# Altium PCB Quadruple_7_Seg_Disp_1.PcbDoc
Units mm, origin at the board's own origin, x right, y up, seen from the top; angles counter-clockwise.
Board outline 79.5 x 36.96 mm, 2 copper layers (Top Layer, Bottom Layer); 29 components, 37 nets, 137 pads, 83 vias.
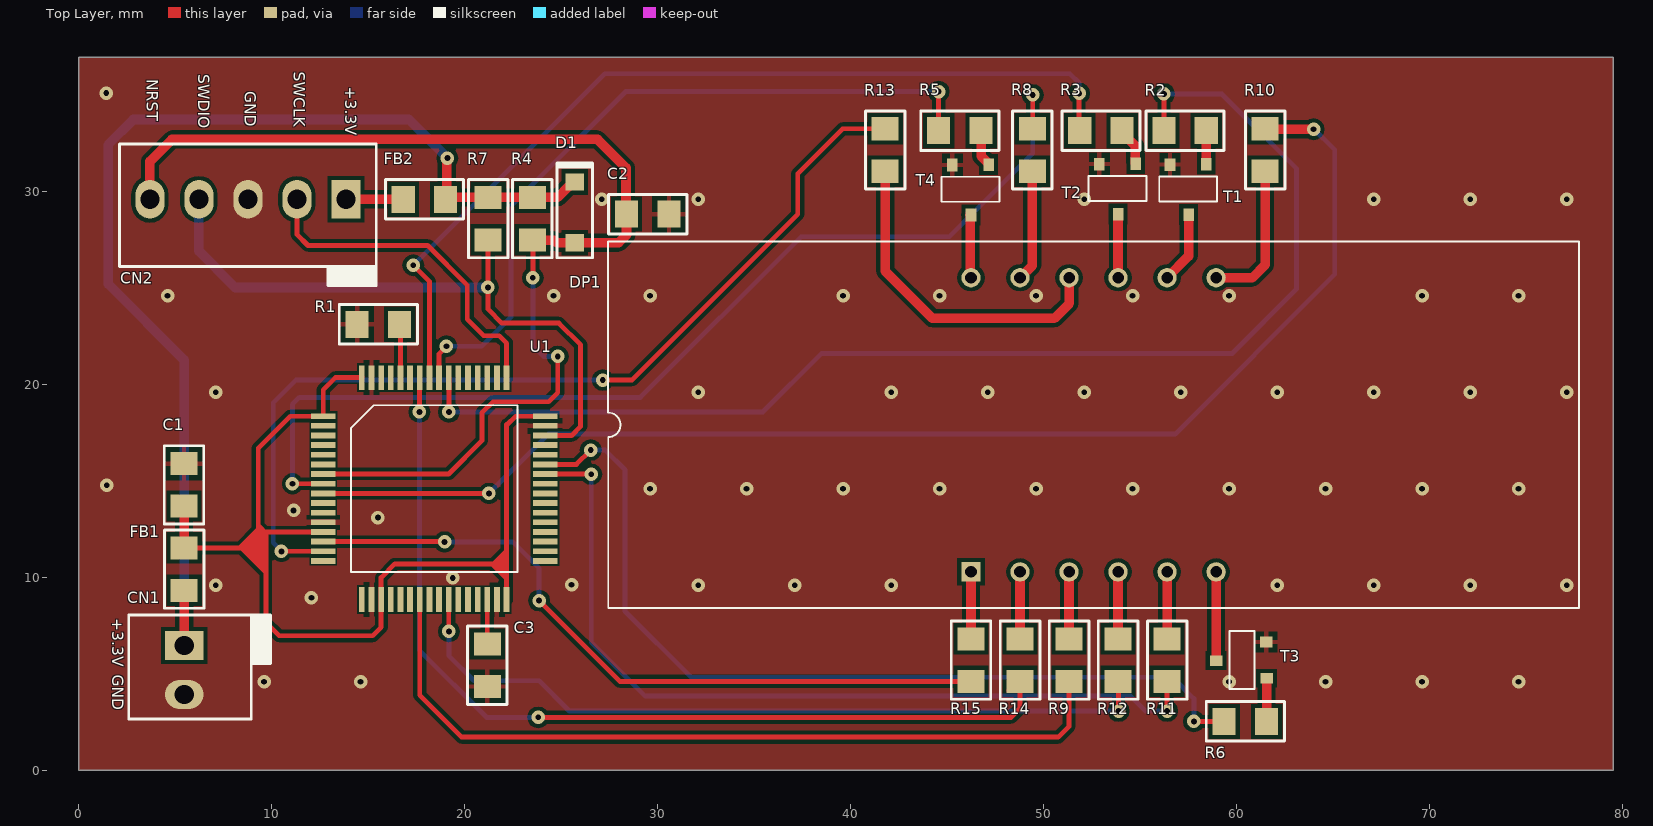
[diagram p0: Top Layer view]
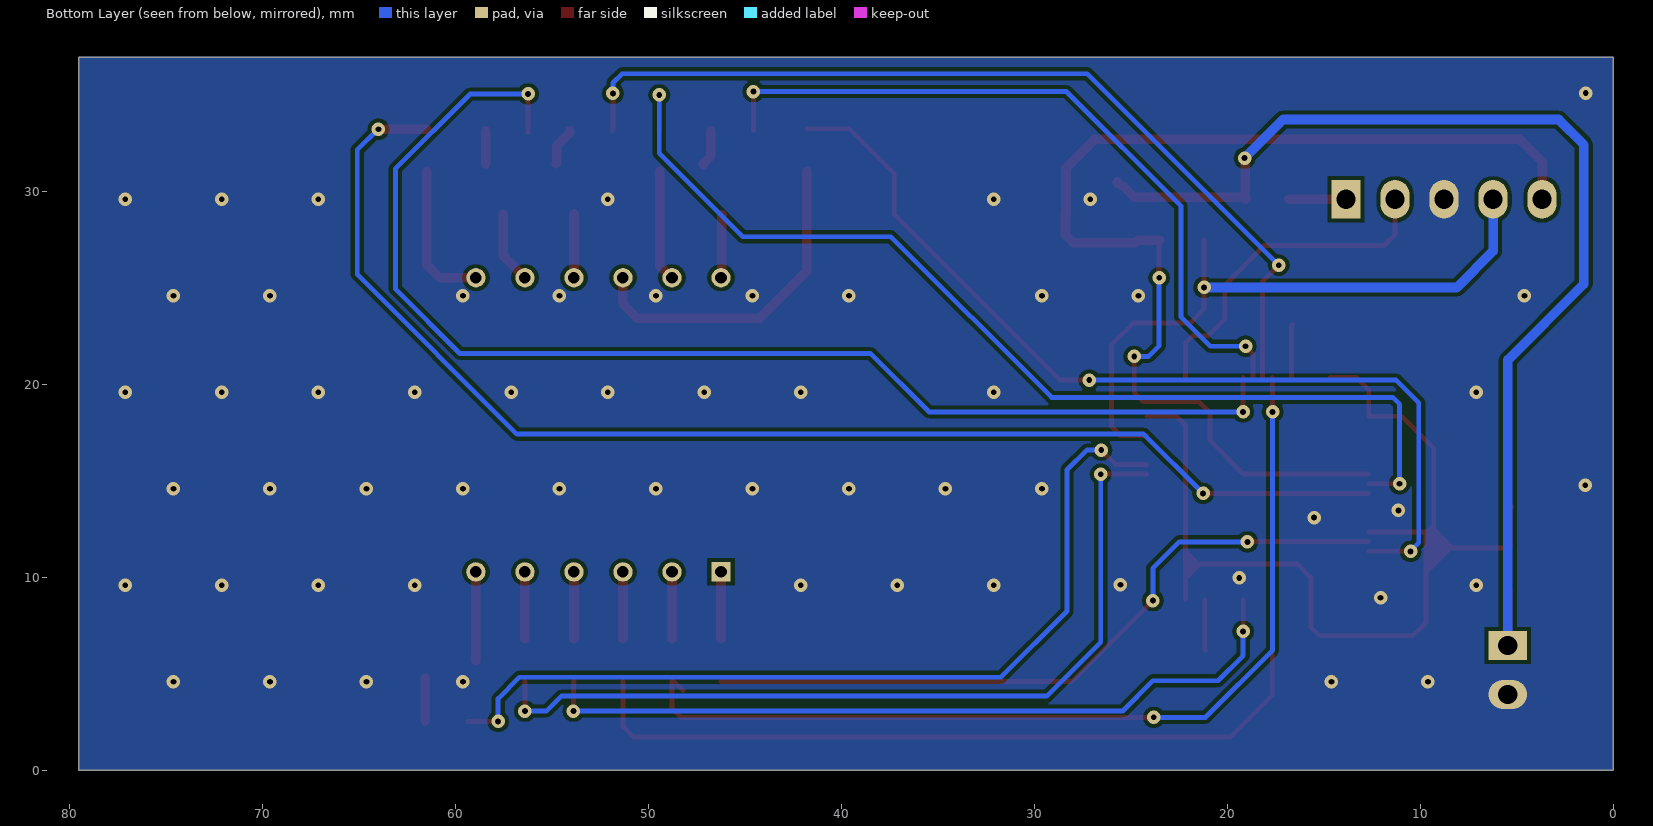
[diagram p1: Bottom Layer view, seen from below]
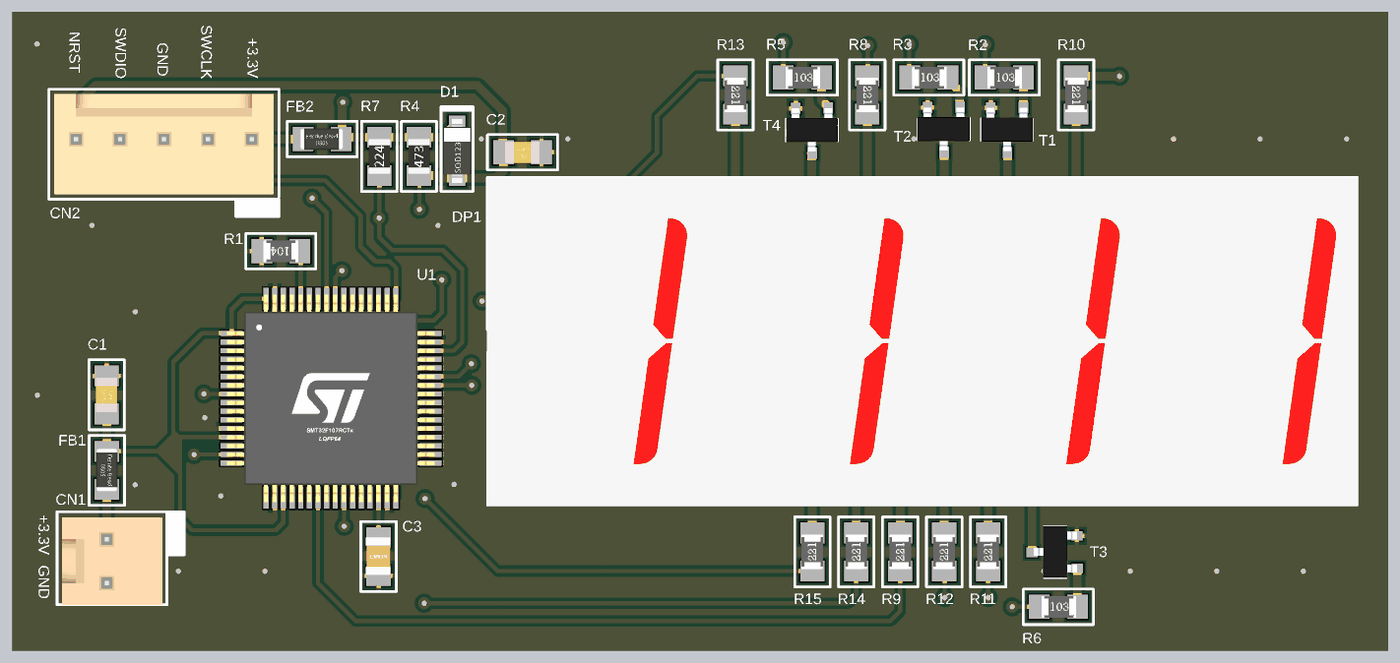
[diagram p2: 3D render of the assembled board from above, using the file's embedded part models]

## Layer stack, top to bottom
Top Solder: solder mask 0.0102, Solder Resist, Dk 3.5
Top Layer: signal copper 0.0356
Dielectric 1: dielectric 0.32, FR-4, Dk 4.8
Bottom Layer: signal copper 0.0356
Bottom Solder: solder mask 0.0102, Solder Resist, Dk 3.5

## Board outline
0,0 79.502,0 79.502,36.957 0,36.957

## Design rules (kind name [scope] priority, off if disabled: settings)
Clearance "Stitching No Net" [IsStitchingVia and InNet('No Net') vs (IsVia and (Not IsStitchingVia)) Or IsPad] p1: gap=0.127 ignorepadtopadclearanceinfootprint=FALSE
Clearance Clearance_U1 [InComponent('U1')] p2: gap=0.1 ignorepadtopadclearanceinfootprint=FALSE
Clearance [All] p3: gap=0.2 ignorepadtopadclearanceinfootprint=FALSE
PlaneConnect [InPadClass('via')] p1: planeconnectstyle=Direct reliefexpansion=0.508 reliefentries=4 reliefconductorwidth=0.254 reliefairgap=0.254
PolygonConnect PolygonConnect_GND [InNet('GND')] p1: thpad.connectstyle=Direct thpad.reliefconductorwidth=0.254 thpad.reliefentries=4 thpad.polygonreliefangle="90 Angle" thpad.airgapwidth=0.254 smdpad.connectstyle=Relief smdpad.reliefconductorwidth=0.254 smdpad.reliefentries=4 smdpad.polygonreliefangle="90 Angle" smdpad.airgapwidth=0.254 via.connectstyle=Direct via.reliefconductorwidth=0.254 via.reliefentries=4 via.polygonreliefangle="90 Angle" via.airgapwidth=0.254
PolygonConnect [All] p2: connectstyle=Relief reliefconductorwidth=0.254 reliefentries=4 polygonreliefangle="90 Angle" airgapwidth=0.254
RoutingVias RoutingVias_GND [All] p1: holewidth=0.711 width=1.27 viastyle="Through Hole" minholewidth=0.711 minwidth=1.27 maxholewidth=0.711 maxwidth=1.27
RoutingVias [All] p2: holewidth=0.3 width=0.7 viastyle="Through Hole" minholewidth=0.3 minwidth=0.7 maxholewidth=0.3 maxwidth=0.7
SilkToSolderMaskClearance [IsPad] p1: minsilkscreentomaskgap=0.2 clearancetoexposedcopper=TRUE
SolderMaskExpansion [All] p1: expansion=0.102
Width [All] p1: maxlimit=1 minlimit=0.2 preferedwidth=0.5
28 further rules are at their usual default settings.

## Components (designator, comment, footprint, x,y, rotation, side; value= is the part's Value field where it differs from the comment)
C1 "100uF/50V" "Capacitor 0805" 5.45,14.8 r270 top
C2 "10nF/50V" "Capacitor 0805" 29.478,28.825 r180 top
C3 "4.7uF/16V" "Capacitor 0805 4.7uF" 21.165,5.45 r90 top
CN1 "PCMC2-02 - Alimentação +3V3" "Header Male Horizontal 2X1" 5.461,5.207 r90 top
CN2 "PCMC2-05 - Gravacao STM32" "Header Macho Horizontal 5x1 - Gravacao STM32" 8.763,29.591 r0 top
D1 "1N4148W-TP" SOD123 25.7,28.916 r90 top
DP1 "LDQ-N516RI" LDQ-N516RI 46.228,10.287 r0 top
FB1 "1A" "Ferrite 0805" 5.461,10.43 r270 top
FB2 "1A" "Ferrite 0805" 17.907,29.591 r0 top
R1 "100k" "RESISTOR 0805 100K" 15.494,23.114 r180 top
R2 "10k" "RESISTOR 0805 10K" 57.32,33.147 r0 top
R3 "10k" "RESISTOR 0805 10K" 52.959,33.147 r0 top
R4 "47K" "Resistor 0805 47k" 23.495,28.591 r90 top
R5 "10k" "RESISTOR 0805 10K" 45.651,33.147 r0 top
R6 "10k" "RESISTOR 0805 10K" 60.444,2.54 r0 top
R7 "220k" "Resistor 0805 220k" 21.209,28.591 r90 top
R8 "220R" "Resistor 0805 220R" 49.403,32.147 r270 top
R9 "220R" "Resistor 0805 220R" 51.308,5.715 r90 top
R10 "220R" "Resistor 0805 220R" 61.468,32.147 r270 top
R11 "220R" "Resistor 0805 220R" 56.388,5.715 r90 top
R12 "220R" "Resistor 0805 220R" 53.848,5.715 r90 top
R13 "220R" "Resistor 0805 220R" 41.783,32.147 r270 top
R14 "220R" "Resistor 0805 220R" 48.768,5.715 r90 top
R15 "220R" "Resistor 0805 220R" 46.228,5.715 r90 top
T1 "BC847" SOT-23 56.998,28.854 r90 top
T2 "BC847" SOT-23 53.34,28.88 r90 top
T3 "BC847" SOT-23 58.979,6.198 r0 top
T4 "BC847" SOT-23 45.72,28.829 r90 top
U1 "STM32F411RET6" LQFP64 18.415,14.605 r0 top

## Footprints (in the part's own frame and the unit in brackets; to place one, negate y for a bottom-side part, rotate by r counter-clockwise, add the part's x,y. Pads: shape width x height; smd on the part's side, far side on the other; paste and mask are expansions set on the pad)
"Capacitor 0805" [mm]
  rect 1.2x1.4 smd: 1(-1.1,0) 2(1.1,0)
  silkscreen extent -2.02,-1.02 2.02,1.02, body extent -1,-0.62 1,0.63, height 0.6
"Capacitor 0805 4.7uF" [mm]
  rect 1.2x1.4 smd: 1(-1.1,0) 2(1.1,0)
  silkscreen extent -2.02,-1.03 2.03,1.02, body extent -1.07,-0.7 1.13,0.75, height 1.4
"Ferrite 0805" [mm]
  rect 1.2x1.4 smd: 1(-1.1,0) 2(1.1,0)
  silkscreen extent -2.02,-1.02 2.02,1.02, body extent -1.28,-0.62 1.23,0.63, height 0.8
"Header Macho Horizontal 5x1 - Gravacao STM32" [mm] "Header Macho Horizontal 5x1 - Gravacao STM32"
  rect 1.5x2 hole 1: 1(5.08,0)
  oval 1.5x2 hole 1: 2(2.54,0) 3(0,0) 4(-2.54,0) 5(-5.08,0)
  silkscreen extent -6.65,-4.48 6.65,2.87, body extent -6.35,-3.2 6.35,2.6, height 11.53
"Header Male Horizontal 2X1" [mm]
  rect 1.5x2 hole 1: 1(1.27,0)
  oval 1.5x2 hole 1: 2(-1.27,0)
  silkscreen extent -2.54,-4.48 2.84,2.87, body extent -2.57,-3.2 2.51,2.6, height 11.6
LDQ-N516RI [mm]
  rect 1x1 hole 0.6: 1(0,0)
  round 1 hole 0.6: 2(2.54,0) 3(5.08,0) 4(7.62,0) 5(10.16,0) 6(12.7,0) 7(12.7,15.24) 8(10.16,15.24) 9(7.62,15.24) 10(5.08,15.24) 11(2.54,15.24) 12(0,15.24)
  silkscreen extent -18.8,-1.88 31.5,17.12, body extent -18.8,-1.88 31.5,17.12, height 8
LQFP64 [mm]
  rect 1.276x0.3 smd: 1(-5.75,3.75) 2(-5.75,3.25) 3(-5.75,2.75) 4(-5.75,2.25) 5(-5.75,1.75) 6(-5.75,1.25) 7(-5.75,0.75) 8(-5.75,0.25) 9(-5.75,-0.25) 10(-5.75,-0.75) 11(-5.75,-1.25) 12(-5.75,-1.75) 13(-5.75,-2.25) 14(-5.75,-2.75) 15(-5.75,-3.25) 16(-5.75,-3.75) 33(5.75,-3.75) 34(5.75,-3.25) 35(5.75,-2.75) 36(5.75,-2.25) 37(5.75,-1.75) 38(5.75,-1.25) 39(5.75,-0.75) 40(5.75,-0.25) 41(5.75,0.25) 42(5.75,0.75) 43(5.75,1.25) 44(5.75,1.75) 45(5.75,2.25) 46(5.75,2.75) 47(5.75,3.25) 48(5.75,3.75)
  rect 0.3x1.276 smd: 17(-3.75,-5.75) 18(-3.25,-5.75) 19(-2.75,-5.75) 20(-2.25,-5.75) 21(-1.75,-5.75) 22(-1.25,-5.75) 23(-0.75,-5.75) 24(-0.25,-5.75) 25(0.25,-5.75) 26(0.75,-5.75) 27(1.25,-5.75) 28(1.75,-5.75) 29(2.25,-5.75) 30(2.75,-5.75) 31(3.25,-5.75) 32(3.75,-5.75) 49(3.75,5.75) 50(3.25,5.75) 51(2.75,5.75) 52(2.25,5.75) 53(1.75,5.75) 54(1.25,5.75) 55(0.75,5.75) 56(0.25,5.75) 57(-0.25,5.75) 58(-0.75,5.75) 59(-1.25,5.75) 60(-1.75,5.75) 61(-2.25,5.75) 62(-2.75,5.75) 63(-3.25,5.75) 64(-3.75,5.75)
  silkscreen extent -4.31,-4.31 4.31,4.31, body extent -6.01,-6.01 5.99,5.99, height 8.6
"RESISTOR 0805 10K" [mm]
  rect 1.2x1.4 smd: 1(-1.1,0) 2(1.1,0)
  silkscreen extent -2.03,-1.02 2.02,1.02, body extent -0.97,-0.62 1.03,0.63, height 0.61
"Resistor 0805 47k" [mm]
  rect 1.2x1.4 smd: 1(-1.1,0) 2(1.1,0)
  silkscreen extent -2.02,-1.02 2.02,1.02, body extent -1,-0.62 1,0.63, height 0.51
"RESISTOR 0805 100K" [mm]
  rect 1.2x1.4 smd: 1(-1.125,0) 2(1.075,0)
  silkscreen extent -2.05,-1.02 2,1.03, body extent -1.03,-0.62 0.97,0.63, height 0.61
"Resistor 0805 220k" [mm]
  rect 1.2x1.4 smd: 1(-1.1,0) 2(1.1,0)
  silkscreen extent -2.02,-1.02 2.02,1.02, body extent -1,-0.62 1,0.63, height 0.51
"Resistor 0805 220R" [mm]
  rect 1.2x1.4 smd: 1(-1.1,0) 2(1.1,0)
  silkscreen extent -2.03,-1.03 2.02,1.02, body extent -1,-0.62 1,0.63, height 0.61
SOD123 [mm]
  rect 0.9x0.95 smd: 1(-1.575,0) 2(1.575,0)
  silkscreen extent -2.35,-0.95 2.6,0.95, body extent -1.85,-0.8 1.85,0.8, height 1.28
SOT-23 [mm]
  rect 0.65x0.55 smd: B(2.565,-1.422) C(-0.051,-0.508) E(2.54,0.457)
  silkscreen extent 0.63,-1.98 1.93,1.02, body extent 0.04,-1.98 2.54,1.02, height 1.09

## Part data
C1: library part CC0805MRX7R9BB104, "Cap Ceramic 0.1uF 50V X7R 20% SMD 0805 125C Paper T/R", Capacitance=100nF, Case/Package=0805, Dielectric=X7R, Manufacturer=Yageo, Max Operating Temperature=125°C, Min Operating Temperature=-55°C, Supplier Part Number 1=311-4351-1-ND, Tolerance=20%, Voltage Rating=50V, ComponentLink1Description=https://datasheet.ciiva.com/13207/upy-gphc-x7r-6-3v-to-50v-8-12304-13207535.pdf?src-supplier=Mouser, ComponentLink1URL=https://datasheet.ciiva.com/13207/upy-gphc-x7r-6-3v-to-50v-8-12304-13207535.pdf?src-supplier=Mouser, Depth=1.25mm, Halogen Free="Halogen Free", Lead Free="Lead Free", Length=0.079inch, Manufacturer Part Number=CC0805MRX7R9BB104, Mount="Surface Mount", Packaging="Tape and Reel", Pricing 1="1 = 0,16000, 10 = 0,11400, 50 = 0,06460, 100 = 0,05350, 500 = 0,03754, 1000 = 0,03108 (USD)", RoHS=Yes, Stock 1=3755, Supplier 1=Digi-Key, Thickness=0.037inch, Voltage Rating (DC)=50V, Width=0.049inch
C2: library part C0805X103F5GEC7210, "Cap Cer 0805 10NF 50V C0G 1%", Manufacturer=KEMET, Supplier Part Number 1=C0805X103F5GEC7210-ND, Manufacturer Part Number=C0805X103F5GEC7210, Pricing 1="10000 = 0,10290 (USD)", Stock 1=0, Supplier 1=Digi-Key
C3: library part C0805C475M4PACTU, "Multilayer Ceramic Capacitors MLCC - SMD/SMT 16volts 4.7uF X5R 20%", Capacitance=4.7uF, Case/Package=0805, Case Code (Metric)=2012, Dielectric=X5R, Dielectric Material=Ceramic, Manufacturer=KEMET, Max Operating Temperature=85°C, Min Operating Temperature=-55°C, Package Quantity=1, Supplier Part Number 1=399-9249-1-ND, Tolerance=20%, Voltage Rating=16V, Case Code (Imperial)=0805, ComponentLink1Description=http://components.arrow.com/part/dataview/40912695S6999520N7429?src-supplier=Arrow, ComponentLink1URL=http://components.arrow.com/part/dataview/40912695S6999520N7429?src-supplier=Arrow, ComponentLink2Description=http://www.mouser.com/ds/2/212/KEM_C1006_X5R_SMD-1103249.pdf?src-supplier=Mouser, ComponentLink2URL=http://www.mouser.com/ds/2/212/KEM_C1006_X5R_SMD-1103249.pdf?src-supplier=Mouser, ComponentLink3Description=https://search.kemet.com/component-edge/download/datasheet/C0805C475M4PACTU.pdf?src-supplier=Digi-Key, ComponentLink3URL=https://search.kemet.com/component-edge/download/datasheet/C0805C475M4PACTU.pdf?src-supplier=Digi-Key, ComponentLink4Description=https://api.kemet.com/component-edge/download/datasheet/C0805C475M4PACTU.pdf?src-supplier=Digi-Key, ComponentLink4URL=https://api.kemet.com/component-edge/download/datasheet/C0805C475M4PACTU.pdf?src-supplier=Digi-Key, Depth=1.25mm, Dissipation Factor=5%, Height=1.25mm, Lead Free="Lead Free", Lead Pitch=0.75mm, Length=2mm, Manufacturer Part Number=C0805C475M4PACTU, Mount="Surface Mount", Packaging="Tape and Reel", Pricing 1="1 = 0,54000, 10 = 0,37800, 50 = 0,26460, 100 = 0,22690, 500 = 0,17016, 1000 = 0,14369 (USD)", RoHS=Yes, Stock 1=4513, Supplier 1=Digi-Key, Termination=SMD/SMT, Thickness=0.055inch, Voltage Rating (DC)=16V, Width=0.049inch
D1: "MICRO COMMERCIAL COMPONENTS - 1N4148W-TP - SWITCHING DIODE, 150mA, 100V, SOD123, FU", Average Rectified Current=150mA, Capacitance=4pF, Forward Voltage=1V, Manufacturer=MCC, Max Forward Surge Current (Ifsm)=1A, Max Operating Temperature=150°C, Max Repetitive Reverse Voltage (Vrrm)=100V, Max Reverse Leakage Current=5uA, Max Surge Current=2A, Min Operating Temperature=-65°C, Package Quantity=3000, Power Dissipation=400mW, Supplier Part Number 1=1N4148WTPMSCT-ND, ComponentLink1Description=https://datasheet.ciiva.com/16836/1n4148wsod123-16836277.pdf?src-supplier=Future+Electronics, ComponentLink1URL=https://datasheet.ciiva.com/16836/1n4148wsod123-16836277.pdf?src-supplier=Future+Electronics, ComponentLink2Description=https://datasheet.ciiva.com/1243/1684829-1243908.pdf?src-supplier=Newark, ComponentLink2URL=https://datasheet.ciiva.com/1243/1684829-1243908.pdf?src-supplier=Newark, ComponentLink3Description=https://datasheet.ciiva.com/4435/1n4148wsod123-48460-4435223.pdf?src-supplier=Mouser, ComponentLink3URL=https://datasheet.ciiva.com/4435/1n4148wsod123-48460-4435223.pdf?src-supplier=Mouser, ComponentLink4Description=https://datasheet.ciiva.com/911/1n4148wsod123-911676.pdf?src-supplier=Digi-Key, ComponentLink4URL=https://datasheet.ciiva.com/911/1n4148wsod123-911676.pdf?src-supplier=Digi-Key, ComponentLink5Description=https://datasheet.ciiva.com/911/1n4148wsod123-911677.pdf?src-supplier=Digi-Key, ComponentLink5URL=https://datasheet.ciiva.com/911/1n4148wsod123-911677.pdf?src-supplier=Digi-Key, ComponentLink6Description=https://datasheet.ciiva.com/22747/1684829-22747439.pdf?src-supplier=Element14, ComponentLink6URL=https://datasheet.ciiva.com/22747/1684829-22747439.pdf?src-supplier=Element14, ComponentLink7Description=https://datasheet.ciiva.com/14557/70055519-14557767.pdf?src-supplier=Allied+Electronics, ComponentLink7URL=https://datasheet.ciiva.com/14557/70055519-14557767.pdf?src-supplier=Allied+Electronics, ComponentLink8Description=https://datasheet.ciiva.com/7622/1684829-7622556.pdf?src-supplier=Element14, ComponentLink8URL=https://datasheet.ciiva.com/7622/1684829-7622556.pdf?src-supplier=Element14, ComponentLink9Description=https://datasheet.ciiva.com/911/1n4148wsod123-911678.pdf?src-supplier=Digi-Key, ComponentLink9URL=https://datasheet.ciiva.com/911/1n4148wsod123-911678.pdf?src-supplier=Digi-Key, ComponentLink10Description=http://datasheet.octopart.com/1N4148W-TP-Micro-Commercial-datasheet-60845.pdf?src-supplier=Element14, ComponentLink10URL=http://datasheet.octopart.com/1N4148W-TP-Micro-Commercial-datasheet-60845.pdf?src-supplier=Element14, ComponentLink11Description=http://datasheet.octopart.com/1N4148W-TP-Micro-Commercial-datasheet-13551187.pdf?src-supplier=Upverter, ComponentLink11URL=http://datasheet.octopart.com/1N4148W-TP-Micro-Commercial-datasheet-13551187.pdf?src-supplier=Upverter, ComponentLink12Description=http://datasheet.octopart.com/1N4148W-TP-MCC-datasheet-8327246.pdf?src-supplier=Future+Electronics, ComponentLink12URL=http://datasheet.octopart.com/1N4148W-TP-MCC-datasheet-8327246.pdf?src-supplier=Future+Electronics, ComponentLink13Description=http://datasheet.octopart.com/1N4148W-TP-MCC-datasheet-124568.pdf?src-supplier=Future+Electronics, ComponentLink13URL=http://datasheet.octopart.com/1N4148W-TP-MCC-datasheet-124568.pdf?src-supplier=Future+Electronics, ComponentLink14Description=http://datasheet.octopart.com/1N4148W-TP-MCC-datasheet-10003094.pdf?src-supplier=Allied+Electronics, ComponentLink14URL=http://datasheet.octopart.com/1N4148W-TP-MCC-datasheet-10003094.pdf?src-supplier=Allied+Electronics, ComponentLink15Description=http://datasheet.octopart.com/1N4148W-TP-Micro-Commercial-datasheet-11773887.pdf?src-supplier=Arrow, ComponentLink15URL=http://datasheet.octopart.com/1N4148W-TP-Micro-Commercial-datasheet-11773887.pdf?src-supplier=Arrow, ComponentLink16Description=http://datasheet.octopart.com/1N4148W-TP-MCC-datasheet-133511570.pdf?src-supplier=Future+Electronics, ComponentLink16URL=http://datasheet.octopart.com/1N4148W-TP-MCC-datasheet-133511570.pdf?src-supplier=Future+Electronics, ComponentLink17Description=http://datasheet.octopart.com/1N4148W-TP-MCC-datasheet-134792309.pdf?src-supplier=TME, ComponentLink17URL=http://datasheet.octopart.com/1N4148W-TP-MCC-datasheet-134792309.pdf?src-supplier=TME, Current Rating=150mA, Element Configuration=Single, Forward Current=150mA, Height=1.2mm, Lead Free="Lead Free", Length=2.85mm, Manufacturer Part Number=1N4148W-TP, Max Reverse Voltage (DC)=100V, Mount="Surface Mount", Number of Pins=2, Output Current=150mA, Packaging="Tape and Reel", Peak Non-Repetitive Surge Current=2A, Polarity=Standard, Pricing 1="1 = 0,17000, 10 = 0,15800, 25 = 0,15000, 100 = 0,06600, 250 = 0,06336, 500 = 0,05184, 1000 = 0,03600 (USD)", Radiation Hardening=No, REACH SVHC=Unknown, Recovery Time=4ns, Reverse Recovery Time=4ns, Stock 1=11901, Supplier 1=Digi-Key, Voltage Rating (DC)=100V, Width=1.8mm
DP1: "DISPLAY, 7 SEGMENT, RED, 14MM", Color=Red, Forward Current=30mA, Forward Voltage=1.8V, Manufacturer=Lumex, Max Operating Temperature=85°C, Max Power Dissipation=100mW, Min Operating Temperature=-20°C, Package Quantity=10, Supplier Part Number 1=67-1450-ND, Test Current=10mA, ComponentLink1Description=https://datasheet.ciiva.com/1316/269248-1316417.pdf?src-supplier=Newark, ComponentLink1URL=https://datasheet.ciiva.com/1316/269248-1316417.pdf?src-supplier=Newark, ComponentLink2Description=https://datasheet.ciiva.com/2103/ldq-n516ri-2103905.pdf?src-supplier=Digi-Key, ComponentLink2URL=https://datasheet.ciiva.com/2103/ldq-n516ri-2103905.pdf?src-supplier=Digi-Key, ComponentLink3Description=https://datasheet.ciiva.com/4421/ldq-n516ri-107399-4421791.pdf?src-supplier=Mouser, ComponentLink3URL=https://datasheet.ciiva.com/4421/ldq-n516ri-107399-4421791.pdf?src-supplier=Mouser, ComponentLink4Description=https://datasheet.ciiva.com/1230/269248-1230278.pdf?src-supplier=Element14, ComponentLink4URL=https://datasheet.ciiva.com/1230/269248-1230278.pdf?src-supplier=Element14, Element Configuration="Common Cathode", Height=0.25inch, Illumination Color=Red, Lead Free="Lead Free", Length=0.25inch, Luminous Intensity=13.3mcd, Manufacturer Part Number=LDQ-N516RI, Number of Pins=12, Operating Supply Voltage=1.8V, Power Consumption=100mW, Pricing 1="1 = 6,73000, 10 = 6,09600, 100 = 4,06400, 500 = 3,49250, 1000 = 3,30200, 2500 = 3,22580, 5000 = 3,17500, 10000 = 3,11150, 25000 = 3,09880 (USD)", REACH SVHC=Unknown, RoHS=Yes, Stock 1=1635, Supplier 1=Digi-Key, Wavelength=660nm, Weight=0.0025lb, Width=0.25inch
FB1 FB2: library part "Bead 1A 0805", "FERRITE BEAD 0805 1LN", Case/Package=0805, DC Resistance (DCR)=300mR, Manufacturer=Fair-Rite, Manufacturer Part Number=2508051027Y1, Max Operating Temperature=125°C, Min Operating Temperature=-55°C, Package Quantity=4000, Supplier Part Number 1=1934-1009-1-ND, Test Frequency=100MHz, Tolerance=25%, ComponentLink1Description=https://datasheet.ciiva.com/3855/9132508051027y1-3855886.pdf?src-supplier=Arrow, ComponentLink1URL=https://datasheet.ciiva.com/3855/9132508051027y1-3855886.pdf?src-supplier=Arrow, Height=0.9mm, Impedance=1kR, Length=2mm, Max DC Current=1A, Packaging="Tape and Reel", Pricing 1="1 = 0,10000, 10 = 0,06100, 25 = 0,05440, 50 = 0,04960, 100 = 0,04460, 250 = 0,03268, 500 = 0,02376, 1000 = 0,02327 (USD)", RoHS=Yes, Stock 1=27360, Supplier 1=Digi-Key, Termination=SMD/SMT, Width=1.25mm
R1: library part RC0805JR-07100KL, "Res Thick Film 0805 100K Ohm 5% 1/8W 100ppm/C Molded SMD SMD Paper T/R", Case/Package=0805, Case Code (Metric)=2012, Manufacturer=Yageo, Max Operating Temperature=155°C, Min Operating Temperature=-55°C, Power Rating=125mW, Resistance=100kR, Supplier Part Number 1=311-100KARCT-ND, Temperature Coefficient=100ppm/°C, Tolerance=5%, Voltage Rating=150V, Case Code (Imperial)=0805, ComponentLink1Description=https://datasheet.ciiva.com/7941/442941-7941864.pdf?src-supplier=Element14, ComponentLink1URL=https://datasheet.ciiva.com/7941/442941-7941864.pdf?src-supplier=Element14, ComponentLink2Description=https://datasheet.ciiva.com/7941/442941-7941865.pdf?src-supplier=Element14, ComponentLink2URL=https://datasheet.ciiva.com/7941/442941-7941865.pdf?src-supplier=Element14, ComponentLink3Description=https://datasheet.ciiva.com/15190/getdatasheetpartid-479267-15190029.pdf?src-supplier=Verical, ComponentLink3URL=https://datasheet.ciiva.com/15190/getdatasheetpartid-479267-15190029.pdf?src-supplier=Verical, Composition="Thick Film", Contact Plating=Tin,Matte,Lead, Depth=1.25mm, Lead Free="Lead Free", Length=2mm, Manufacturer Part Number=RC0805JR-07100KL, Military Standard=Not, Packaging="Tape and Reel", Pricing 1="1 = 0,10000, 10 = 0,03500, 100 = 0,01400, 1000 = 0,00631, 2500 = 0,00548 (USD)", Radiation Hardening=No, REACH SVHC=Unknown, RoHS=Yes, Stock 1=2684406, Supplier 1=Digi-Key, Termination=SMD/SMT
R2 R3 R5 R6: library part RC0805JR-0710KL, "YAGEO - RC0805JR-0710KL - RES, 10K, 5%, 0.125W, 0805, THICK FILM", Case/Package=0805, Case Code (Metric)=2012, Manufacturer=Yageo, Max Operating Temperature=155°C, Min Operating Temperature=-55°C, Power Rating=125mW, Resistance=10kR, Supplier Part Number 1=311-10KARCT-ND, Temperature Coefficient=100ppm/°C, Tolerance=5%, Voltage Rating=150V, Case Code (Imperial)=0805, ComponentLink1Description=https://datasheet.ciiva.com/7941/444164-7941871.pdf?src-supplier=Element14, ComponentLink1URL=https://datasheet.ciiva.com/7941/444164-7941871.pdf?src-supplier=Element14, ComponentLink2Description=https://datasheet.ciiva.com/7983/444164-7983765.pdf?src-supplier=Element14, ComponentLink2URL=https://datasheet.ciiva.com/7983/444164-7983765.pdf?src-supplier=Element14, ComponentLink3Description=https://datasheet.ciiva.com/7941/444164-7941870.pdf?src-supplier=Element14, ComponentLink3URL=https://datasheet.ciiva.com/7941/444164-7941870.pdf?src-supplier=Element14, Composition="Thick Film", Contact Plating=Tin,Matte, Depth=1.25mm, Height=0.5mm, Lead Free="Lead Free", Length=2mm, Manufacturer Part Number=RC0805JR-0710KL, Military Standard=Not, Packaging="Tape and Reel", Pricing 1="1 = 0,10000, 10 = 0,03500, 100 = 0,01400, 1000 = 0,00631, 2500 = 0,00548 (USD)", Radiation Hardening=No, REACH SVHC=Unknown, RoHS=Yes, Stock 1=9991822, Supplier 1=Digi-Key, Termination=SMD/SMT, Width=1.25mm
R4: library part RC0805JR-0747KL, "YAGEO (PHYCOMP)   RC0805JR-0747KL   Surface Mount Chip Resistor, Thick Film, RC Series, 47 kohm, 125 mW,  5%, 150 V", Case/Package=0805, Case Code (Metric)=2012, Manufacturer=Yageo, Max Operating Temperature=155°C, Min Operating Temperature=-55°C, Power Rating=125mW, Resistance=47kR, Supplier Part Number 1=311-47KARCT-ND, Temperature Coefficient=100ppm/°C, Tolerance=5%, Voltage Rating=150V, Case Code (Imperial)=0805, ComponentLink1Description=https://datasheet.ciiva.com/7941/442941-7941967.pdf?src-supplier=Element14, ComponentLink1URL=https://datasheet.ciiva.com/7941/442941-7941967.pdf?src-supplier=Element14, ComponentLink2Description=https://datasheet.ciiva.com/17200/rc0805-17200744.pdf?src-supplier=Future+Electronics, ComponentLink2URL=https://datasheet.ciiva.com/17200/rc0805-17200744.pdf?src-supplier=Future+Electronics, Composition="Thick Film", Contact Plating=Tin,Lead,Matte, Depth=1.25mm, Lead Free="Lead Free", Length=2mm, Manufacturer Part Number=RC0805JR-0747KL, Military Standard=Not, Packaging="Tape and Reel", Pricing 1="1 = 0,10000, 10 = 0,03500, 100 = 0,01400, 1000 = 0,00631, 2500 = 0,00548 (USD)", Radiation Hardening=No, REACH SVHC=Unknown, RoHS=Yes, Stock 1=972470, Supplier 1=Digi-Key, Termination=SMD/SMT
R7: library part RC0805JR-07220KL, "YAGEO - RC0805JR-07220KL - RES, 220K, 5%, 0.125W, 0805, THICK FILM", Case/Package=0805, Case Code (Metric)=2012, Manufacturer=Yageo, Max Operating Temperature=155°C, Max Power Dissipation=125mW, Min Operating Temperature=-55°C, Package Quantity=1, Resistance=220kR, Supplier Part Number 1=311-220KARCT-ND, Temperature Coefficient=100ppm/°C, Tolerance=5%, Voltage Rating=150V, Case Code (Imperial)=0805, ComponentLink1Description=https://datasheet.ciiva.com/5925/442941-5925072.pdf?src-supplier=Farnell, ComponentLink1URL=https://datasheet.ciiva.com/5925/442941-5925072.pdf?src-supplier=Farnell, ComponentLink2Description=https://datasheet.ciiva.com/2456/pyu-r-int-thick-7-2456369.pdf?src-supplier=Digi-Key, ComponentLink2URL=https://datasheet.ciiva.com/2456/pyu-r-int-thick-7-2456369.pdf?src-supplier=Digi-Key, ComponentLink3Description=https://datasheet.ciiva.com/2456/pyu-r-int-thick-7-2456370.pdf?src-supplier=Digi-Key, ComponentLink3URL=https://datasheet.ciiva.com/2456/pyu-r-int-thick-7-2456370.pdf?src-supplier=Digi-Key, ComponentLink4Description=https://datasheet.ciiva.com/2456/pyu-r-int-thick-7-2456371.pdf?src-supplier=Digi-Key, ComponentLink4URL=https://datasheet.ciiva.com/2456/pyu-r-int-thick-7-2456371.pdf?src-supplier=Digi-Key, ComponentLink5Description=https://datasheet.ciiva.com/16741/rc0805-16741415.pdf?src-supplier=Future+Electronics, ComponentLink5URL=https://datasheet.ciiva.com/16741/rc0805-16741415.pdf?src-supplier=Future+Electronics, ComponentLink6Description=https://datasheet.ciiva.com/7941/442941-7941915.pdf?src-supplier=Element14, ComponentLink6URL=https://datasheet.ciiva.com/7941/442941-7941915.pdf?src-supplier=Element14, ComponentLink7Description=https://datasheet.ciiva.com/7941/442941-7941916.pdf?src-supplier=Element14, ComponentLink7URL=https://datasheet.ciiva.com/7941/442941-7941916.pdf?src-supplier=Element14, Composition="Thick Film", Contact Plating=Tin,Matte,Lead, Depth=1.25mm, Features="Moisture Resistant", Height=0.024inch, Lead Free="Lead Free", Length=2mm, Manufacturer Part Number=RC0805JR-07220KL, Military Standard=Not, Number of Terminations=2, Packaging="Tape and Reel", Power Rating=125mW, Pricing 1="1 = 0,10000, 10 = 0,03500, 100 = 0,01400, 1000 = 0,00631, 2500 = 0,00548 (USD)", Radiation Hardening=No, REACH SVHC=Unknown, RoHS=Yes, Stock 1=367499, Supplier 1=Digi-Key, Termination=SMD/SMT, Width=0.049inch, Working Voltage=150V
R8 R9 R10 R11 R12 R13 R14 R15: library part RC0805JR-07220RL, "Res General Purpose Thick Film 0805 220 Ohm 5% 1/8W ±100ppm/°C Molded SMD Paper T/R", Case/Package=0805, Case Code (Metric)=2012, Manufacturer=Yageo, Max Operating Temperature=155°C, Min Operating Temperature=-55°C, Power Rating=125mW, Supplier Part Number 1=311-220ARCT-ND, Temperature Coefficient=100ppm/°C, Tolerance=5%, Voltage Rating=150V, Case Code (Imperial)=0805, ComponentLink1Description=https://datasheet.ciiva.com/16914/rc0805-16914046.pdf?src-supplier=Future+Electronics, ComponentLink1URL=https://datasheet.ciiva.com/16914/rc0805-16914046.pdf?src-supplier=Future+Electronics, ComponentLink2Description=https://datasheet.ciiva.com/7941/442941-7941917.pdf?src-supplier=Element14, ComponentLink2URL=https://datasheet.ciiva.com/7941/442941-7941917.pdf?src-supplier=Element14, ComponentLink3Description=https://datasheet.ciiva.com/7941/442941-7941918.pdf?src-supplier=Element14, ComponentLink3URL=https://datasheet.ciiva.com/7941/442941-7941918.pdf?src-supplier=Element14, Composition="Thick Film", Contact Plating=Tin,Matte,Lead, Depth=1.25mm, Lead Free="Lead Free", Length=2mm, Manufacturer Part Number=RC0805JR-07220RL, Military Standard=Not, Packaging="Tape and Reel", Pricing 1="1 = 0,10000, 10 = 0,03500, 100 = 0,01400, 1000 = 0,00631, 2500 = 0,00548 (USD)", Radiation Hardening=No, REACH SVHC=Unknown, Resistance=220R, RoHS=Yes, Stock 1=890574, Supplier 1=Digi-Key, Termination=SMD/SMT
T1 T2 T3 T4: library part BC847C-13-F, "Trans GP BJT NPN 45V 0.1A 350mW Automotive 3-Pin SOT-23 T/R", Case/Package=SOT-23, Collector Base Voltage (VCBO)=50V, Collector Emitter Breakdown Voltage=45V, Emitter Base Voltage (VEBO)=6V, Frequency=300MHz, Manufacturer=Diodes, Max Collector Current=100mA, Max Operating Temperature=150°C, Max Power Dissipation=310mW, Min Operating Temperature=-65°C, Package Quantity=10000, Power Dissipation=350mW, Supplier Part Number 1=BC847C-13-FDICT-ND, Collector Emitter Voltage (VCEO)=45V, ComponentLink1Description=http://components.arrow.com/part/dataview/50855856S8619087N2867?src-supplier=Arrow, ComponentLink1URL=http://components.arrow.com/part/dataview/50855856S8619087N2867?src-supplier=Arrow, ComponentLink2Description=http://components.arrow.com/part/dataview/0323_01117098?src-supplier=Arrow+Europe, ComponentLink2URL=http://components.arrow.com/part/dataview/0323_01117098?src-supplier=Arrow+Europe, ComponentLink3Description=http://www.mouser.com/ds/2/115/ds11108-8549.pdf?src-supplier=Mouser, ComponentLink3URL=http://www.mouser.com/ds/2/115/ds11108-8549.pdf?src-supplier=Mouser, ComponentLink4Description=https://www.diodes.com/assets/Datasheets/ds11108.pdf?src-supplier=Digi-Key, ComponentLink4URL=https://www.diodes.com/assets/Datasheets/ds11108.pdf?src-supplier=Digi-Key, ComponentLink5Description=http://www.diodes.com/datasheets/ds11108.pdf?src-supplier=Avnet, ComponentLink5URL=http://www.diodes.com/datasheets/ds11108.pdf?src-supplier=Avnet, ComponentLink6Description=http://www.diodes.com/datasheets/ds11108.pdf?src-supplier=Avnet+Europe, ComponentLink6URL=http://www.diodes.com/datasheets/ds11108.pdf?src-supplier=Avnet+Europe, Contact Plating=Tin,Matte, Manufacturer Part Number=BC847C-13-F, Mount="Surface Mount", Number of Elements=1, Number of Pins=3, Packaging="Tape and Reel", Polarity=NPN, Pricing 1="1 = 0,19000, 10 = 0,17200, 25 = 0,16400, 100 = 0,07220, 250 = 0,06932, 500 = 0,05672, 1000 = 0,03939, 2500 = 0,03440, 5000 = 0,03086 (USD)", REACH SVHC="No SVHC", RoHS=Yes, Stock 1=14218, Supplier 1=Digi-Key, Transition Frequency=300MHz
U1: "IC MCU 32BIT 512KB FLASH 64LQFP", Case/Package=LQFP, Frequency=100MHz, Manufacturer=STMicroelectronics, Max Operating Temperature=85°C, Max Power Dissipation=313mW, Max Supply Voltage=3.6V, Min Operating Temperature=-40°C, Min Supply Voltage=1.7V, Operating Supply Voltage=3.3V, Package Quantity=960, Supplier Part Number 1=497-14909-ND, ComponentLink1Description=http://www.mouser.com/ds/2/389/stm32f411ce-956237.pdf?src-supplier=Mouser, ComponentLink1URL=http://www.mouser.com/ds/2/389/stm32f411ce-956237.pdf?src-supplier=Mouser, ComponentLink2Description=http://www.farnell.com/datasheets/1941006.pdf?src-supplier=Farnell, ComponentLink2URL=http://www.farnell.com/datasheets/1941006.pdf?src-supplier=Farnell, ComponentLink3Description=http://www.st.com/st-web-ui/static/active/en/resource/technical/document/datasheet/DM00115249.pdf?src-supplier=Avnet, ComponentLink3URL=http://www.st.com/st-web-ui/static/active/en/resource/technical/document/datasheet/DM00115249.pdf?src-supplier=Avnet, ComponentLink4Description=http://www.st.com/content/ccc/resource/technical/document/datasheet/b3/a5/46/3b/b4/e5/4c/85/DM00115249.pdf/files/DM00115249.pdf/jcr:content/translations/en.DM00115249.pdf?src-supplier=Digi-Key, ComponentLink4URL=http://www.st.com/content/ccc/resource/technical/document/datasheet/b3/a5/46/3b/b4/e5/4c/85/DM00115249.pdf/files/DM00115249.pdf/jcr:content/translations/en.DM00115249.pdf?src-supplier=Digi-Key, ComponentLink5Description=http://www.farnell.com/datasheets/1941006.pdf?src-supplier=Newark, ComponentLink5URL=http://www.farnell.com/datasheets/1941006.pdf?src-supplier=Newark, ComponentLink6Description=http://www.farnell.com/datasheets/1869644.pdf?src-supplier=Element14, ComponentLink6URL=http://www.farnell.com/datasheets/1869644.pdf?src-supplier=Element14, Core Architecture=ARM, Data Bus Width=32b, Interface=I2C,SPI,USB,IrDA,MMC,SDIO,SD,UART,USART,LIN,I2S, Lead Free="Lead Free", Length=10mm, Manufacturer Part Number=STM32F411RET6, Max Frequency=100MHz, Memory Size=512KB, Memory Type=FLASH, Mount="Surface Mount", Number of ADC Channels=16, Number of I/Os=50, Number of Pins=64, Number of Programmable I/O=50, Number of Timers/Counters=8, Oscillator Type=Internal, Packaging=Tray, Peripherals="Brown-out Detect/Reset,POR,PWM,WDT,DMA", Pricing 1="1 = 6,81000, 10 = 6,15600, 25 = 5,87000, 100 = 5,09690, 250 = 4,86780, 500 = 4,43828, 1000 = 3,86559, 2500 = 3,72242, 5000 = 3,57925 (USD)", Radiation Hardening=No, RAM Size=128KB, REACH SVHC="No SVHC", RoHS=Yes, Stock 1=5414, Supplier 1=Digi-Key, Watchdog Timer=Yes, Weight=0.012088oz, Width=10mm

## Via types
v1: diameter 0.7, hole 0.3, Top Layer to Bottom Layer, tented both sides, 83 vias

## Nets (pads, with @x,y where several pads share a name; then routed paths per layer and width w, separated by ;. In a path a pad name is that pad's centre, name@x,y a point inside that pad or via, vN(x,y) a via of type N, cw(c..) or ccw(c..) an arc to the next point about the centre after c; other vN are vias at no path point)
+3V3: CN1.1 D1.2 FB1.2 FB2.2 R4.2 R7.2 | length 58
  Top Layer w0.5: CN1.1 FB1.2 ; FB2.2 FB2.2@19.087,29.671 ; v1(19.1,31.725) 19.062,31.687 19.062,29.696 FB2.2@19.087,29.671 ; D1.2@25.384,30.25 25.375,30.25 24.816,29.691 R4.2 R7.2 19.107,29.691 FB2.2@19.087,29.671 ; D1.2@25.65,30.441 D1.2 ; D1.2@25.658,30.408 D1.2@25.7,30.45
  Bottom Layer w0.5: CN1.1 5.461,21.264 1.525,25.2 1.525,32.425 2.825,33.725 17.1,33.725 v1@18.962,31.862
DP: R9.1 U1.23 | length 42.1
  Top Layer w0.25: U1.23 17.665,3.894 19.834,1.725 50.75,1.725 51.308,2.283 R9.1
GND: C1.1 C2.1 C3.1 CN1.2 CN2.3 R1.2 T1.E T2.E T3.E T4.E U1.12 U1.18 U1.31 U1.47 U1.63
  other v1: 9.6,4.6 14.6,4.6 59.6,4.6 64.6,4.6 69.6,4.6 74.6,4.6 12.05,8.95 7.1,9.6 32.1,9.6 37.1,9.6 42.1,9.6 62.1,9.6 67.1,9.6 72.1,9.6 77.1,9.6 25.53,9.625 19.375,9.975 15.5,13.1 11.125,13.475 29.6,14.6 34.6,14.6 39.6,14.6 44.6,14.6 49.6,14.6 54.6,14.6 59.6,14.6 64.6,14.6 69.6,14.6 74.6,14.6 1.45,14.775 7.1,19.6 32.1,19.6 42.1,19.6 47.1,19.6 52.1,19.6 57.1,19.6 62.1,19.6 67.1,19.6 72.1,19.6 77.1,19.6 4.6,24.6 24.6,24.6 29.6,24.6 39.6,24.6 44.6,24.6 49.6,24.6 54.6,24.6 59.6,24.6 69.6,24.6 74.6,24.6 27.1,29.6 32.1,29.6 52.1,29.6 67.1,29.6 72.1,29.6 77.1,29.6 1.425,35.1
NetC3_2: C3.2 U1.30 | length 2.6
  Top Layer w0.25: C3.2@21.125,6.223 21.165,6.263 U1.30
NetCN2_1: CN2.1 FB2.1 | length 3
  Top Layer w0.5: CN2.1 FB2.1
NetDP1_1: DP1.1 R15.2 | length 3.5
  Top Layer w0.5: R15.2 DP1.1
NetDP1_2: DP1.2 R14.2 | length 3.5
  Top Layer w0.5: R14.2 DP1.2
NetDP1_3: DP1.3 R9.2 | length 3.5
  Top Layer w0.5: R9.2 DP1.3
NetDP1_4: DP1.4 R12.2 | length 3.5
  Top Layer w0.5: R12.2 DP1.4
NetDP1_5: DP1.5 R11.2 | length 3.5
  Top Layer w0.5: R11.2 DP1.5
NetDP1_6: DP1.6 T3.C | length 4.6
  Top Layer w0.5: T3.C DP1.6
NetDP1_7: DP1.7 R10.2 | length 7.7
  Top Layer w0.5: DP1.7 58.93,25.525 60.8,25.525 61.468,26.193 R10.2
NetDP1_8: DP1.8 T1.C | length 3.7
  Top Layer w0.5: DP1.8 57.506,26.645 T1.C
NetDP1_9: DP1.9 T2.C | length 3.3
  Top Layer w0.5: DP1.9 T2.C
NetDP1_10: DP1.10 R13.2 | length 17.4
  Top Layer w0.5: R13.2 41.783,25.867 44.225,23.425 50.55,23.425 51.325,24.2 51.325,25.51 DP1.10
NetDP1_11: DP1.11 R8.2 | length 5.8
  Top Layer w0.5: DP1.11 49.403,26.162 R8.2
NetDP1_12: DP1.12 T4.C | length 3.3
  Top Layer w0.5: T4.C@46.17,28.778 46.195,28.753 46.195,25.56 DP1.12
NetR1_1: R1.1 U1.60 | length 2.8
  Top Layer w0.25: R1.1 16.665,23.068 U1.60
NetR2_1: R2.1 U1.55 | length 65.1
  Top Layer w0.25: U1.55 19.175,20.345 v1(19.175,18.575) ; R2.1@56.22,33.047 56.225,33.052 v1(56.225,35.05)
  Bottom Layer w0.25: v1(19.175,18.575) 35.45,18.575 38.475,21.6 59.75,21.6 63.1,24.95 63.1,31.175 59.225,35.05 v1(56.225,35.05)
NetR2_2: R2.2 T1.B | length 1.7
  Top Layer w0.5: T1.B R2.2
NetR3_1: R3.1 U1.57 | length 47.5
  Top Layer w0.25: v1(17.325,26.175) 18.165,25.335 U1.57 ; v1(51.825,35.075) 51.825,33.181 R3.1
  Bottom Layer w0.25: v1(17.325,26.175) 27.25,36.1 51.35,36.1 51.825,35.625 v1(51.825,35.075)
NetR3_2: R3.2 T2.B | length 2
  Top Layer w0.5: R3.2 54.059,33.047 54.737,32.369 54.737,31.47 T2.B
NetR5_1: R5.1 U1.56 | length 38.1
  Top Layer w0.25: U1.56 18.665,21.59 v1(19.05,21.975) ; v1(44.55,35.175) 44.55,33.148 R5.1
  Bottom Layer w0.25: v1(19.05,21.975) 20.875,21.975 22.4,23.5 22.4,29.25 28.325,35.175 v1(44.55,35.175)
NetR5_2: R5.2 T4.B | length 1.9
  Top Layer w0.5: R5.2 46.751,31.836 47.142,31.444 T4.B
NetR6_1: R6.1 U1.43 | length 46.3
  Top Layer w0.25: U1.43@24.167,15.859 24.17,15.856 25.781,15.856 v1(26.525,16.6) ; v1(57.775,2.54) R6.1
  Bottom Layer w0.25: v1(26.525,16.6) 27.275,16.6 28.3,15.575 28.3,8.25 31.725,4.825 56.675,4.825 57.775,3.725 v1(57.775,2.54)
NetR6_2: R6.2 T3.B | length 2.2
  Top Layer w0.5: R6.2 T3.B
NRST: C2.2 CN2.5 D1.1 R4.1 U1.7 | length 59.9
  Top Layer w0.25: U1.7 19.155,15.355 20.887,17.087 20.887,18.523 21.464,19.1 24.34,19.1 24.816,19.576 v1(24.816,21.45) ; R4.1 23.511,27.475 23.525,27.461 v1(23.525,25.525)
  Top Layer w0.5: CN2.5 3.683,31.558 4.825,32.7 26.875,32.7 28.35,31.225 28.35,28.847 28.375,28.822 28.375,27.75 27.966,27.341 D1.1 24.759,27.341 24.625,27.475 R4.1@23.511,27.475
  Bottom Layer w0.25: v1@23.525,25.527 v1(23.525,25.525) 23.525,22 24.075,21.45 v1(24.816,21.45)
SEG_A: R8.1 U1.8 | length 54.2
  Top Layer w0.25: v1(11.07,14.855) U1.8 ; R8.1 49.425,33.269 v1(49.425,35)
  Bottom Layer w0.25: v1(11.07,14.855) 11.07,18.97 11.425,19.325 29.1,19.325 37.425,27.65 45.1,27.65 49.425,31.975 v1(49.425,35)
SEG_B: R10.1 U1.9 | length 67.5
  Top Layer w0.25: U1.9 v1@21.15,14.355 ; R10.1 R10.1@61.49,33.225
  Top Layer w0.5: R10.1@61.49,33.225 v1(63.975,33.225)
  Bottom Layer w0.25: v1(21.25,14.35) 24.325,17.425 56.8,17.425 65.075,25.7 65.075,32.15 v1@63.975,33.25
SEG_C: R12.1 U1.26 | length 40.4
  Top Layer w0.25: U1.26 19.17,8.85 19.17,7.205 v1(19.175,7.2) ; R12.1 53.875,4.588 v1(53.875,3.075)
  Bottom Layer w0.25: v1(19.175,7.2) 19.175,5.95 20.475,4.65 23.85,4.65 25.425,3.075 v1(53.875,3.075)
SEG_D: R14.1 U1.58 | length 49.1
  Top Layer w0.25: v1(17.65,18.575) 17.658,18.583 17.658,20.347 U1.58 ; v1@23.8,2.775 23.825,2.75 48.3,2.75 48.768,3.218 R14.1 48.668,4.615 R14.1@48.193,4.14
  Bottom Layer w0.25: v1(17.65,18.575) 17.65,6.225 21.125,2.75 v1(23.8,2.75)
SEG_E: R15.1 U1.14 | length 37.5
  Top Layer w0.25: U1.14 18.937,11.855 v1(18.95,11.842) ; v1(23.85,8.8) 28.035,4.615 R15.1
  Bottom Layer w0.25: v1(18.95,11.842) 22.483,11.842 23.85,10.475 v1(23.85,8.8)
SEG_F: R13.1 U1.15 | length 48.8
  Top Layer w0.25: v1(10.5,11.35) 10.503,11.353 12.663,11.353 U1.15 ; v1@27.2,20.225 28.661,20.225 37.25,28.814 37.25,30.925 39.572,33.247 R13.1
  Bottom Layer w0.25: v1@10.525,11.35 10.075,11.8 10.075,19.05 11.25,20.225 v1(27.15,20.225)
SEG_G: R11.1 U1.42 | length 44
  Top Layer w0.25: U1.42 24.167,15.352 26.548,15.352 v1(26.55,15.35) ; v1@56.3,3.025 56.388,3.113 R11.1
  Bottom Layer w0.25: v1(26.55,15.35) 26.55,6.65 29.35,3.85 54.5,3.85 55.275,3.075 v1(56.388,3.075)
SWCLK: CN2.2 U1.49 | length 17.8
  Top Layer w0.25: CN2.2 11.303,27.772 11.875,27.2 18.075,27.2 20.125,25.15 20.125,23.375 20.975,22.525 21.775,22.525 22.165,22.135 U1.49
SWDIO: CN2.4 R7.1 U1.46 | length 33.9
  Top Layer w0.25: R7.1 21.209,23.891 21.925,23.175 24.875,23.175 26,22.05 26,17.825 25.53,17.355 U1.46
  Bottom Layer w0.5: CN2.4 6.223,26.902 8.1,25.025 v1(21.2,25.025)
VDD: C1.2 FB1.1 U1.1 U1.13 U1.19 U1.32 U1.48 U1.64 | length 53.1
  Top Layer w0.25: FB1.1 8.43,11.53 ; U1.13@12.665,12.359 12.456,12.359 12.452,12.355 9.3,12.355 ; U1.64 13.293,20.355 12.663,19.725 12.663,18.357 U1.1 10.955,18.355 9.3,16.7 9.3,12.355 ; U1.19@15.64,8.83 U1.19 15.665,9.99 16.375,10.7 21.4,10.7 21.445,10.655 ; U1.19@15.665,8.83 15.665,7.419 15.221,6.975 10.375,6.975 9.7,7.65 9.7,10.26 8.43,11.53 ; U1.32 22.165,9.935 21.445,10.655 ; 22.165,17.925 22.165,11.374 21.445,10.655 ; 22.2,17.925 22.63,18.355 U1.48 ; 8.43,11.53 9.255,12.355 9.3,12.355
  Top Layer w0.5: C1.2@5.4,13.65 C1.2 5.456,13.694 5.456,11.535 FB1.1
pads on no net: U1.2 U1.3 U1.4 U1.5 U1.6 U1.10 U1.11 U1.16 U1.17 U1.20 U1.21 U1.22 U1.24 U1.25 U1.27 U1.28 U1.29 U1.33 U1.34 U1.35 U1.36 U1.37 U1.38 U1.39 U1.40 U1.41 U1.44 U1.45 U1.50 U1.51 U1.52 U1.53 U1.54 U1.59 U1.61 U1.62

## Polygon pours and split planes (outlines as drawn)
GND on Top Layer "Top Layer-GND" (solid, pour order 0): 0,36.95 79.502,36.975 79.502,0 0,0
GND on Bottom Layer "Bottom Layer-GND" (solid, pour order 2): 0,36.975 79.525,36.975 79.5,36.95 79.5,0 0,0

## Other copper
Top Layer:
  region: 9.8,11.5
  region net VDD: 9.825,10.135 9.825,12.325 9.4,12.75 9.269,12.75 9.269,12.619 8.305,11.655
  region: 21.975,10.73
  region: 21.975,10.73
  region net VDD: 22.275,9.825 22.275,11.374 22.074,11.374 21.4,10.7
  region net VDD: 22.165,9.935

## Silkscreen, mask and mechanical layers (free items; w line width, h text height)
Mechanical 1:
  the board outline again, w0.5

## Text inside footprints (layer, text, board x,y; h text height)
CN1: Top Overlay "+3.3V" at 1.524,7.874 h1 r270; Top Overlay "GND" at 1.524,4.953 h1 r270
CN2: Top Overlay "GND" at 8.382,35.179 h1 r270; Top Overlay "NRST" at 3.302,35.814 h1 r270; Top Overlay "SWDIO" at 5.969,36.068 h1 r270; Top Overlay "SWCLK" at 10.922,36.195 h1 r270; Top Overlay "+3.3V" at 13.589,35.433 h1 r270